# EAGLE board ACB-R1.1 (EAGLE 8.6.0)

Size 63.5 x 185.5 mm. Coordinates in mm from the lower left corner, seen from the top.
Outline: 0,0 63.5,0 63.5,185.5 0,185.5 0,0
Copper layers (1*16): Top 0.035mm / dielectric 1.5mm / Bottom 0.035mm
Design rules "default *": minimum track width 0.2mm, minimum drill 0.3mm, track to track 0.2mm, track to pad 0.2mm, pad to pad 0.2mm, via to via 0.2mm, smd to smd 0.001mm, copper to edge 0.5mm, drill to drill 0.2mm, minimum pad ring 0.3mm, minimum via ring 0.25mm, stop-mask expansion 0.1mm, vias tented up to drill 0.6mm, thermal gap 0.35mm
Net classes: 1 HV: clearance 0.3 mm to class 0
tRestrict: 34 lines

## Footprints (pad centres in the part's own frame; a part is rotated, then mirrored left to right if it is on the bottom)
0603 = smd 0.762 x 0.965: 1 -0.787,0; 2 0.787,0
1206-POL-C = smd 1.19 x 1.79: + -1.6,0; - 1.6,0
1206 = smd 1.143 x 1.702: 1 -1.473,0; 2 1.473,0
CT-C = smd 2.743 x 2.311: + -2.54,0; - 2.54,0
CAP_8MM_DIA_SMT = smd 1.59 x 3.99: 1 0,3.4; 2 0,-3.4
SMA = smd 2.159 x 2.743: + -2.311,0.003; - 2.108,-0.002
SMB@1 = smd 2.4 x 2.4: A 2.2,0; C -2.2,0
0805-POL-D = smd 0.99 x 1.39: A 1,0; K -1,0
SMA' = smd 2.21 x 1.575: A -2.223,0; K 2.223,0
LITTLEFUSE0154 = smd 4.6 x 3.8: 1 3.5,0; 2 -3.5,0
CAM-HOLDER = hole 3.2: 0,4; 0,-4
TQFP100_14X14_0,5MM = smd 1.39 x 0.28: 1 -7.7,6; 2 -7.7,5.5; 3 -7.7,5; 4 -7.7,4.5; 5 -7.7,4; 6 -7.7,3.5; 7 -7.7,3; 8 -7.7,2.5; 9 -7.7,2; 10 -7.7,1.5; 11 -7.7,1; 12 -7.7,0.5; 13 -7.7,0; 14 -7.7,-0.5; 15 -7.7,-1; 16 -7.7,-1.5; 17 -7.7,-2; 18 -7.7,-2.5; 19 -7.7,-3; 20 -7.7,-3.5; 21 -7.7,-4; 22 -7.7,-4.5; 23 -7.7,-5; 24 -7.7,-5.5; 25 -7.7,-6; 51 7.7,-6; 52 7.7,-5.5; 53 7.7,-5; 54 7.7,-4.5; 55 7.7,-4; 56 7.7,-3.5; 57 7.7,-3; 58 7.7,-2.5; 59 7.7,-2; 60 7.7,-1.5; 61 7.7,-1; 62 7.7,-0.5; 63 7.7,0; 64 7.7,0.5; 65 7.7,1; 66 7.7,1.5; 67 7.7,2; 68 7.7,2.5; 69 7.7,3; 70 7.7,3.5; 71 7.7,4; 72 7.7,4.5; 73 7.7,5; 74 7.7,5.5; 75 7.7,6 | smd 0.28 x 1.39: 26 -6,-7.7; 27 -5.5,-7.7; 28 -5,-7.7; 29 -4.5,-7.7; 30 -4,-7.7; 31 -3.5,-7.7; 32 -3,-7.7; 33 -2.5,-7.7; 34 -2,-7.7; 35 -1.5,-7.7; 36 -1,-7.7; 37 -0.5,-7.7; 38 0,-7.7; 39 0.5,-7.7; 40 1,-7.7; 41 1.5,-7.7; 42 2,-7.7; 43 2.5,-7.7; 44 3,-7.7; 45 3.5,-7.7; 46 4,-7.7; 47 4.5,-7.7; 48 5,-7.7; 49 5.5,-7.7; 50 6,-7.7; 76 6,7.7; 77 5.5,7.7; 78 5,7.7; 79 4.5,7.7; 80 4,7.7; 81 3.5,7.7; 82 3,7.7; 83 2.5,7.7; 84 2,7.7; 85 1.5,7.7; 86 1,7.7; 87 0.5,7.7; 88 0,7.7; 89 -0.5,7.7; 90 -1,7.7; 91 -1.5,7.7; 92 -2,7.7; 93 -2.5,7.7; 94 -3,7.7; 95 -3.5,7.7; 96 -4,7.7; 97 -4.5,7.7; 98 -5,7.7; 99 -5.5,7.7; 100 -6,7.7
48-TSOP-I = smd 1.4 x 0.28: 1 -9.7,5.75; 2 -9.7,5.25; 3 -9.7,4.75; 4 -9.7,4.25; 5 -9.7,3.75; 6 -9.7,3.25; 7 -9.7,2.75; 8 -9.7,2.25; 9 -9.7,1.75; 10 -9.7,1.25; 11 -9.7,0.75; 12 -9.7,0.25; 13 -9.7,-0.25; 14 -9.7,-0.75; 15 -9.7,-1.25; 16 -9.7,-1.75; 17 -9.7,-2.25; 18 -9.7,-2.75; 19 -9.7,-3.25; 20 -9.7,-3.75; 21 -9.7,-4.25; 22 -9.7,-4.75; 23 -9.7,-5.25; 24 -9.7,-5.75; 25 9.7,-5.75; 26 9.7,-5.25; 27 9.7,-4.75; 28 9.7,-4.25; 29 9.7,-3.75; 30 9.7,-3.25; 31 9.7,-2.75; 32 9.7,-2.25; 33 9.7,-1.75; 34 9.7,-1.25; 35 9.7,-0.75; 36 9.7,-0.25; 37 9.7,0.25; 38 9.7,0.75; 39 9.7,1.25; 40 9.7,1.75; 41 9.7,2.25; 42 9.7,2.75; 43 9.7,3.25; 44 9.7,3.75; 45 9.7,4.25; 46 9.7,4.75; 47 9.7,5.25; 48 9.7,5.75
TSSOP20 = smd 1.6 x 0.35: 1 -2.9,2.925; 2 -2.9,2.275; 3 -2.9,1.625; 4 -2.9,0.975; 5 -2.9,0.325; 6 -2.9,-0.325; 7 -2.9,-0.975; 8 -2.9,-1.625; 9 -2.9,-2.275; 10 -2.9,-2.925; 11 2.9,-2.925; 12 2.9,-2.275; 13 2.9,-1.625; 14 2.9,-0.975; 15 2.9,-0.325; 16 2.9,0.325; 17 2.9,0.975; 18 2.9,1.625; 19 2.9,2.275; 20 2.9,2.925
SOT23-5 = smd 0.59 x 1.19: 1 -0.95,-1.2; 2 0,-1.2; 3 0.95,-1.2; 4 0.95,1.2; 5 -0.95,1.2
SC-70-5 = smd 0.39 x 0.99: 1 -0.65,-1; 2 0,-1; 3 0.65,-1; 4 0.65,1; 5 -0.65,1
MSOP-08 = smd 0.38 x 1.2: 1 -1,-2.1; 2 -0.35,-2.1; 3 0.3,-2.1; 4 0.95,-2.1; 5 0.95,2.1; 6 0.3,2.1; 7 -0.35,2.1; 8 -1,2.1
MSOP10EXP = smd 0.3 x 1.2: 1 -1,-2.2; 2 -0.5,-2.2; 3 0,-2.2; 4 0.5,-2.2; 5 1,-2.2; 6 1,2.2; 7 0.5,2.2; 8 0,2.2; 9 -0.5,2.2; 10 -1,2.2 | smd 1.88 x 1.68: EP 0,0
SO-08 = smd 0.61 x 1.524: 1 -1.905,-2.743; 2 -0.635,-2.743; 3 0.635,-2.743; 4 1.905,-2.743; 5 1.905,2.743; 6 0.635,2.743; 7 -0.635,2.743; 8 -1.905,2.743
SOT23-5' = smd 0.6 x 1.2: 1 -0.95,-1.206; 2 0,-1.206; 3 0.95,-1.206; 4 0.95,1.206; 5 -0.95,1.206
SO08 = smd 0.61 x 1.524: 1 -1.905,-2.743; 2 -0.635,-2.743; 3 0.635,-2.743; 4 1.905,-2.743; 5 1.905,2.743; 6 0.635,2.743; 7 -0.635,2.743; 8 -1.905,2.743
SOT23 = smd 0.69 x 1.19: 1 0.95,1.2; 2 -0.95,1.2; 3 0,-1.2
SOT-143 = smd 1.09 x 1.19: 1 -0.75,-1.2 | smd 0.69 x 1.19: 2 0.95,-1.2; 3 0.95,1.2; 4 -0.95,1.2
FH12A-24S-05SH = smd 0.3 x 1.5: 1 -5.75,2.8; 2 -5.25,2.8; 3 -4.75,2.8; 4 -4.25,2.8; 5 -3.75,2.8; 6 -3.25,2.8; 7 -2.75,2.8; 8 -2.25,2.8; 9 -1.75,2.8; 10 -1.25,2.8; 11 -0.75,2.8; 12 -0.25,2.8; 13 0.25,2.8; 14 0.75,2.8; 15 1.25,2.8; 16 1.75,2.8; 17 2.25,2.8; 18 2.75,2.8; 19 3.25,2.8; 20 3.75,2.8; 21 4.25,2.8; 22 4.75,2.8; 23 5.25,2.8; 24 5.75,2.8 | smd 1.8 x 1.6: C1 -7.75,-0.5; C2 7.75,-0.5
RJ8-8-180 = drill 0.9 pad 1.4: 1 -4.445,6.35; 2 -3.175,8.89; 3 -1.905,6.35; 4 -0.635,8.89; 5 0.635,6.35; 6 1.905,8.89; 7 3.175,6.35; 8 4.445,8.89 | hole 3.2: 5.715,0; -5.715,0
MOLEX430450613 = drill 1.1 pad 1.8: 1 3,-1.5; 2 0,-1.5; 3 -3,-1.5; 4 3,1.5; 5 0,1.5; 6 -3,1.5 | hole 1: 6,2.45; -6,2.45
3-641215-2 = drill 1 pad 1.8 square: 1 1.27,0 | drill 1 pad 1.8: 2 -1.27,0
DM3AT = smd 0.69 x 1.19: 1 3.3,8; 2 2.2,8; 3 1.1,8; 4 0,8; 5 -1.1,8; 6 -2.2,8; 7 -3.3,8; 8 -4.4,8; G2 -5.35,8 | smd 0.99 x 1.19: G1 4.95,8 | smd 1.19 x 1.19: G3 -6.4,3.7 | smd 1.19 x 0.99: G4 -6.4,-2.6 | smd 1.19 x 2.79: G5 -6.4,-6.65 | smd 1.59 x 1.89: G6 7.3,-7.1
USB_B_180 = drill 0.8 pad 1.4: 1_+5V 1.25,2.8; 2_D- -1.25,2.8; 3_D+ -1.25,-0.6; 4_GND 1.25,-0.6 | drill 2.2 pad 2.8: SH1 -6,0; SH2 6,0
MA08-1-MALE = drill 1 pad 1.6 square: 1 -8.89,0 | drill 1 pad 1.6: 2 -6.35,0; 3 -3.81,0; 4 -1.27,0; 5 1.27,0; 6 3.81,0; 7 6.35,0; 8 8.89,0
MA08-2 = drill 1 pad 1.6 square: 1 -8.89,-1.27 | drill 1 pad 1.6: 2 -8.89,1.27; 3 -6.35,-1.27; 4 -6.35,1.27; 5 -3.81,-1.27; 6 -3.81,1.27; 7 -1.27,-1.27; 8 -1.27,1.27; 9 1.27,-1.27; 10 1.27,1.27; 11 3.81,-1.27; 12 3.81,1.27; 13 6.35,-1.27; 14 6.35,1.27; 15 8.89,-1.27; 16 8.89,1.27
MA05-1 = drill 1 pad 1.6 square: 1 -5.08,0 | drill 1 pad 1.6: 2 -2.54,0; 3 0,0; 4 2.54,0; 5 5.08,0
JP3CLOSE12 = drill 1 pad 1.626 square: 1 -2.54,0 | drill 1 pad 1.626: 2 0,0; 3 2.54,0
1206@1 = smd 1.19 x 1.79: 1 -1.6,0; 2 1.6,0
NR6028 = smd 2.3 x 5.7: 1 2.4,0; 2 -2.4,0
TEMP-PAD = smd 0.2 x 0.2: P$1 0,0
PCB-VPS = drill 3.2 pad 6.6: VPS_PCB_1 55,4
BT_MODULE_BRD = drill 3 pad 6.6: 1 25.5,20.5
MICRO_FET = smd 0.4 x 0.8: 1 -0.65,-1.1; 2 0,-1.1; 3 0.65,-1.1; 4 0.65,1.1; 5 0,1.1; 6 -0.65,1.1 | smd 0.7 x 0.86: P1 -0.5,0; P2 0.5,0
SC70-6 = smd 0.39 x 0.99: 1 -0.65,-1; 2 0,-1; 3 0.65,-1; 4 0.65,1; 5 0,1; 6 -0.65,1
SSOT-6 = smd 0.6 x 1.2: 1 -0.95,-1.2; 2 0,-1.2; 3 0.95,-1.206; 4 0.95,1.2; 5 0,1.2; 6 -0.95,1.2
0603@1 = smd 0.79 x 0.99: 1 -0.8,0; 2 0.8,0
0805 = smd 0.9 x 1.4: 1 -1.04,0; 2 1.04,0
SMD_ROUND_1MM = smd 1 x 1: P$1 0,0
TH_ROUND_14MM08MM = drill 0.8 pad 1.4: P$1 0,0
7B = smd 2 x 1.2: 1 -1.9,-1.2; 2 1.9,-1.2; 3 1.9,1.2; 4 -1.9,1.2

## Placement (x,y rotation side)
C1  100n  [0603]  176.68,58.16 180 top  (outside the outline)
C2  100n  [0603]  167.08,37.66 270 top  (outside the outline)
C3  100n  [0603]  112.08,76.26 90 top  (outside the outline)
C4  100n  [0603]  174.18,86.76 270 top  (outside the outline)
C5  100n  [0603]  112.08,82.06 90 top  (outside the outline)
C6  100n  [0603]  174.18,80.96 270 top  (outside the outline)
C7  100n  [0603]  112.08,79.16 90 top  (outside the outline)
C8  100n  [0603]  174.18,83.86 270 top  (outside the outline)
C9  10uTA  [1206-POL-C]  110.18,74.16 270 top  (outside the outline)
C10  10uTA  [1206-POL-C]  176.08,88.86 90 top  (outside the outline)
C11  10uTA  [1206-POL-C]  110.18,83.96 90 top  (outside the outline)
C12  10uTA  [1206-POL-C]  176.08,79.06 270 top  (outside the outline)
C13  10uTA  [1206-POL-C]  110.18,79.06 270 top  (outside the outline)
C14  10uTA  [1206-POL-C]  176.08,83.96 90 top  (outside the outline)
C15  10u  [0603]  119.78,97.26 180 top  (outside the outline)
C16  10uTA  [1206-POL-C]  110.98,97.06 180 top  (outside the outline)
C17  10uTA  [1206-POL-C]  120.98,93.26 270 top  (outside the outline)
C18  100n  [0603]  119.08,95.06 270 top  (outside the outline)
C19  100n  [0603]  116.38,94.36 0 top  (outside the outline)
C20  10uTA  [1206-POL-C]  117.38,92.46 0 top  (outside the outline)
C21  1n->10n  [0603]  119.48,100.66 180 top  (outside the outline)
C22  4u7/50  [1206]  179.68,120.66 90 top  (outside the outline)
C23  4u7/50  [1206]  177.38,120.66 90 top  (outside the outline)
C24  1n  [0603]  168.28,115.56 90 top  (outside the outline)
C25  470n/25  [0603]  176.88,116.76 270 top  (outside the outline)
C26  10p  [0603]  170.08,122.86 0 top  (outside the outline)
C27  100n  [0603]  106.48,67.76 0 top  (outside the outline)
C28  100n  [0603]  181.28,63.56 0 top  (outside the outline)
C29  4u7/50  [1206]  132.18,106.76 0 top  (outside the outline)
C30  47u/6.3  [1206]  175.18,114.16 180 top  (outside the outline)
C31  47uTC  [CT-C]  173.48,111.16 180 top  (outside the outline)
C32  100n  [0603]  158.68,124.76 180 top  (outside the outline)
C33  100n  [0603]  144.58,96.06 270 top  (outside the outline)
C34  1n  [0603]  144.58,98.96 90 top  (outside the outline)
C35  100n  [0603]  176.18,105.16 0 top  (outside the outline)
C36  100n  [0603]  123.98,33.66 270 top  (outside the outline)
C37  100n  [0603]  121.88,126.46 270 top  (outside the outline)
C38  100n  [0603]  125.98,119.76 180 top  (outside the outline)
C39  100n  [0603]  108.48,118.16 270 top  (outside the outline)
C40  100n  [0603]  107.78,28.76 90 top  (outside the outline)
C41  100n  [0603]  114.98,110.86 180 top  (outside the outline)
C42  100n  [0603]  170.08,129.06 270 top  (outside the outline)
C43  1n  [0603]  164.88,133.26 0 top  (outside the outline)
C44  1n  [0603]  117.38,135.56 90 top  (outside the outline)
C45  100n  [0603]  117.38,132.66 270 top  (outside the outline)
C46  100n  [0603]  162.98,135.06 180 top  (outside the outline)
C47  100n  [0603]  144.08,45.56 0 top  (outside the outline)
C48  1u  [0603]  136.68,34.06 0 top  (outside the outline)
C49  100n  [0603]  131.28,33.66 270 top  (outside the outline)
C50  1u  [0603]  119.68,44.56 180 top  (outside the outline)
C51  100n  [0603]  120.08,55.36 90 top  (outside the outline)
C52  1u  [0603]  132.18,58.06 90 top  (outside the outline)
C53  10u  [0603]  135.98,59.16 90 top  (outside the outline)
C54  10uTA  [1206-POL-C]  134.08,59.06 90 top  (outside the outline)
C55  100n  [0603]  127.68,33.66 270 top  (outside the outline)
C56  10uTA  [1206-POL-C]  129.58,27.56 270 top  (outside the outline)
C57  100n->10n  [0603]  126.18,33.66 270 top  (outside the outline)
C58  100n  [0603]  124.88,27.26 0 top  (outside the outline)
C59  1u->100n  [0603]  124.88,25.76 0 top  (outside the outline)
C60  18p  [0603]  147.88,46.66 0 top  (outside the outline)
C61  18p  [0603]  148.18,54.46 0 top  (outside the outline)
C62  1n  [0603]  159.68,109.46 180 top  (outside the outline)
C63  1n  [0603]  157.88,106.86 90 top  (outside the outline)
C64  100n  [0603]  122.48,33.66 270 top  (outside the outline)
C65  1n  [0603]  118.68,47.56 180 top  (outside the outline)
C66  10n  [0603]  118.68,46.06 180 top  (outside the outline)
C67  10u  [0603]  160.38,101.46 180 top  (outside the outline)
C68  1n->10n  [0603]  116.48,27.76 90 top  (outside the outline)
C69  1n  [0603]  115.78,37.66 270 top  (outside the outline)
C70  1n  [0603]  110.18,100.46 0 top  (outside the outline)
C71  47uTC  [CT-C]  103.88,104.36 90 top  (outside the outline)
C72  100n  [0603]  106.48,102.16 90 top  (outside the outline)
C73  47uTC  [CT-C]  176.58,102.16 180 top  (outside the outline)
C74  100n  [0603]  182.18,101.06 180 top  (outside the outline)
C75  100n  [0603]  172.68,89.76 90 top  (outside the outline)
C76  100n  [0603]  112.08,86.66 270 top  (outside the outline)
C77  100n  [0603]  123.38,132.46 0 top  (outside the outline)
C78  100n  [0603]  123.78,134.96 270 top  (outside the outline)
C79  100n  [0603]  162.68,131.76 90 top  (outside the outline)
C80  100n  [0603]  162.68,128.86 90 top  (outside the outline)
C81  47uTC  [CT-C]  109.98,32.96 180 top  (outside the outline)
C82  1u  [0603]  104.28,67.36 90 top  (outside the outline)
C83  220u/25V  [CAP_8MM_DIA_SMT]  131.38,112.36 90 top  (outside the outline)
C84  220u/25V  [CAP_8MM_DIA_SMT]  179.58,129.86 180 top  (outside the outline)
C85  100n  [0603]  159.78,29.16 180 top  (outside the outline)
C86  10uTA  [1206-POL-C]  113.98,108.96 180 top  (outside the outline)
C87  10uTA  [1206-POL-C]  161.88,43.26 90 top  (outside the outline)
C88  10u  [0603]  127.68,29.96 90 top  (outside the outline)
D2  SMLVT3V3  [SMA]  167.38,109.96 90 top  (outside the outline)
D3  P6SMB20A  [SMB@1]  138.38,104.86 0 top  (outside the outline)
D4  P6SMB20A  [SMB@1]  147.98,104.86 0 top  (outside the outline)
D5  LED-GREEN  [0805-POL-D]  113.08,68.26 0 top  (outside the outline)
D6  SS14  [SMA']  138.68,91.86 0 top  (outside the outline)
D7  SS14  [SMA']  182.38,121.76 270 top  (outside the outline)
F1  T1A-LITTLEFUSE0154  [LITTLEFUSE0154]  131.88,99.46 90 top  (outside the outline)
H1  CAM-HOLDER  [CAM-HOLDER]  58.42,90.96 0 top
H2  CAM-HOLDER  [CAM-HOLDER]  5.08,90.96 0 top
IC1  PIC32MX470F512L-I/PF  [TQFP100_14X14_0,5MM]  131.88,45.86 0 top  (outside the outline)
IC2  R1LV1616  [48-TSOP-I]  177.73,43.06 90 top  (outside the outline)
IC3  74LVC573APW-TSSOP20  [TSSOP20]  167.48,49.89 0 top  (outside the outline)
IC4  74LVC573APW-TSSOP20  [TSSOP20]  167.48,42.78 0 top  (outside the outline)
IC5  TLV73315PDBV  [SOT23-5]  115.58,96.96 90 top  (outside the outline)
IC6  MIC841LYC  [SC-70-5]  177.18,107.56 90 top  (outside the outline)
IC7  24LC32A-I/MS  [MSOP-08]  180.68,61.01 90 top  (outside the outline)
IC8  LT3971EMSE  [MSOP10EXP]  172.58,117.96 90 top  (outside the outline)
IC9  AT25SF321-SSHD  [SO-08]  107.48,63.26 0 top  (outside the outline)
IC10  MAX9938HEUK+T  [SOT23-5']  125.28,109.06 270 top  (outside the outline)
IC11  24LC32A-I/MS  [MSOP-08]  180.68,66.26 90 top  (outside the outline)
IC12  SN65HVD12D  [SO08]  117.38,114.46 90 top  (outside the outline)
IC13  REF3025  [SOT23]  124.58,29.96 270 top  (outside the outline)
IC14  TPD2E001DZDR  [SOT-143]  111.08,117.56 0 top  (outside the outline)
IC15  TPD2E001DZDR  [SOT-143]  158.78,26.46 270 top  (outside the outline)
IC16  MCP6042-I/MS  [MSOP-08]  160.88,105.46 180 top  (outside the outline)
J1  FH12A-24S-0.5SH  [FH12A-24S-05SH]  18,90.95 90 top
J2  FH12A-24S-0.5SH  [FH12A-24S-05SH]  45.5,90.95 270 top
J3  RJ8-8-180  [RJ8-8-180]  31.75,157.54 180 bottom
J4  RJ8-8-180  [RJ8-8-180]  31.75,175.04 180 bottom
J5  MOLEX430450613  [MOLEX430450613]  45.75,173.04 90 bottom
J6  MOLEX430450613  [MOLEX430450613]  17.75,173.04 270 bottom
J7  3-641215-2  [3-641215-2]  44.75,159.74 270 bottom
J8  3-641215-2  [3-641215-2]  18.75,159.74 90 bottom
J9  3-641215-2  [3-641215-2]  5.08,106.2 270 top
J10  3-641215-2  [3-641215-2]  58.42,106.2 90 top
J11  DNP-DM3AT  [DM3AT]  12.4,73.3 270 bottom
J12  USB_A_180  [USB_B_180]  55.48,5.16 0 top
J14  pin1x8  [MA08-1-MALE]  17.68,183.36 0 bottom
J15  pin2x8  [MA08-2]  5,47.5 90 top
J17  DNP-open-hole  [MA05-1]  8.48,2.06 0 top
JP1  JP3CLOSE12  [JP3CLOSE12]  171.38,125.36 0 top  (outside the outline)
L1  LQM31PN3R3M00L  [1206@1]  110.98,94.76 180 top  (outside the outline)
L2  LQM31PN3R3M00L  [1206@1]  176.08,93.76 90 top  (outside the outline)
L3  LQM31PN3R3M00L  [1206@1]  110.18,88.86 270 top  (outside the outline)
L4  LQM31PN3R3M00L  [1206@1]  176.08,74.16 270 top  (outside the outline)
L5  LQM31PN3R3M00L  [1206@1]  110.98,92.46 180 top  (outside the outline)
L6  LQM31PN3R3M00L  [1206@1]  175.28,97.36 180 top  (outside the outline)
L7  HI1206T500R  [1206@1]  133.18,126.26 0 top  (outside the outline)
L8  HI1206T500R  [1206@1]  133.18,123.96 0 top  (outside the outline)
L9  NR6028T4R7M  [NR6028]  180.78,114.36 90 top  (outside the outline)
L10  HI1206T500R  [1206@1]  143.18,103.86 90 top  (outside the outline)
L11  HI1206T500R  [1206@1]  137.78,101.56 180 top  (outside the outline)
L12  HI1206T500R  [1206@1]  147.48,101.66 0 top  (outside the outline)
L13  LQM31PN3R3M00L  [1206@1]  133.68,26.26 0 top  (outside the outline)
O1  PIC-OUT  [TEMP-PAD]  123.18,52.16 0 top  (outside the outline)
O2  PIC-RPX  [TEMP-PAD]  123.18,49.36 90 top  (outside the outline)
O3  PIC-RPX  [TEMP-PAD]  123.18,48.86 90 top  (outside the outline)
O4  PIC-RPX  [TEMP-PAD]  123.18,48.36 90 top  (outside the outline)
O5  PIC-RPX  [TEMP-PAD]  123.18,47.86 0 top  (outside the outline)
O6  PIC-RPX  [TEMP-PAD]  123.18,46.86 0 top  (outside the outline)
O7  PIC-RPX  [TEMP-PAD]  123.18,46.36 0 top  (outside the outline)
O8  PIC-RPX  [TEMP-PAD]  123.18,45.46 0 top  (outside the outline)
O9  PIC-OUT  [TEMP-PAD]  122.58,43.86 0 top  (outside the outline)
O10  PIC-RPX  [TEMP-PAD]  122.58,43.36 0 top  (outside the outline)
O11  PIC-RPX  [TEMP-PAD]  122.58,42.86 0 top  (outside the outline)
O12  PIC-RPX  [TEMP-PAD]  122.58,42.46 0 top  (outside the outline)
O13  PIC-RPX  [TEMP-PAD]  122.58,41.66 0 top  (outside the outline)
O14  PIC-RPX  [TEMP-PAD]  121.48,41.26 270 top  (outside the outline)
O15  PIC-RPX  [TEMP-PAD]  125.58,36.66 90 top  (outside the outline)
O16  PIC-RPX  [TEMP-PAD]  126.18,36.66 0 top  (outside the outline)
O17  PIC-OUT  [TEMP-PAD]  131.88,37.06 0 top  (outside the outline)
O18  PIC-RPX  [TEMP-PAD]  132.38,37.06 0 top  (outside the outline)
O19  PIC-RPX  [TEMP-PAD]  132.88,37.06 0 top  (outside the outline)
O20  PIC-RPX  [TEMP-PAD]  138.68,36.56 0 top  (outside the outline)
O21  PIC-RPX  [TEMP-PAD]  138.68,36.96 0 top  (outside the outline)
O22  PIC-OUT  [TEMP-PAD]  127.08,56.96 0 top  (outside the outline)
O23  PIC-OUT  [TEMP-PAD]  127.48,56.96 0 top  (outside the outline)
O24  PIC-OUT  [TEMP-PAD]  127.88,56.96 0 top  (outside the outline)
O25  PIC-OUT  [TEMP-PAD]  129.08,56.96 0 top  (outside the outline)
O26  PIC-OUT  [TEMP-PAD]  129.48,56.96 0 top  (outside the outline)
O27  PIC-RPX  [TEMP-PAD]  129.88,56.96 0 top  (outside the outline)
O28  PIC-RPX  [TEMP-PAD]  130.28,56.96 0 top  (outside the outline)
O29  PIC-RPX  [TEMP-PAD]  130.68,56.96 0 top  (outside the outline)
O30  PIC-RPX  [TEMP-PAD]  131.08,56.96 0 top  (outside the outline)
O31  PIC-OUT  [TEMP-PAD]  134.08,55.16 0 top  (outside the outline)
O32  PIC-OUT  [TEMP-PAD]  134.38,54.86 0 top  (outside the outline)
O33  PIC-RPX  [TEMP-PAD]  137.28,54.76 0 top  (outside the outline)
O34  PIC-RPX  [TEMP-PAD]  137.88,54.76 0 top  (outside the outline)
O35  PIC-RPX  [TEMP-PAD]  138.88,55.16 0 top  (outside the outline)
O36  PIC-RPX  [TEMP-PAD]  140.78,51.96 90 top  (outside the outline)
O37  PIC-RPX  [TEMP-PAD]  141.18,51.96 90 top  (outside the outline)
O38  PIC-RPX  [TEMP-PAD]  141.58,51.96 90 top  (outside the outline)
O39  PIC-OUT  [TEMP-PAD]  140.53,44.86 0 top  (outside the outline)
O40  PIC-OUT  [TEMP-PAD]  140.53,44.36 0 top  (outside the outline)
O41  PIC-RPX  [TEMP-PAD]  141.03,40.86 180 top  (outside the outline)
O42  PIC-RPX  [TEMP-PAD]  140.48,40.36 180 top  (outside the outline)
O43  PIC-RPX  [TEMP-PAD]  140.48,39.86 0 top  (outside the outline)
O44  PIC-OUT  [TEMP-PAD]  122.58,42.06 0 top  (outside the outline)
PCB2  DNP-PCB-VPS  [PCB-VPS]  0,30 0 top
PCB3  DNP-PCB-BT  [BT_MODULE_BRD]  29.68,184.56 270 bottom
Q1  SSM6P49NU,LFPZ  [MICRO_FET]  115.08,100.26 90 top  (outside the outline)
Q2  SSM6P49NU,LFPZ  [MICRO_FET]  116.18,32.76 0 top  (outside the outline)
Q3  FDG6303N  [SC70-6]  103.88,110.36 180 top  (outside the outline)
Q4  FDG6303N  [SC70-6]  148.38,98.56 180 top  (outside the outline)
Q5  FDC6506P  [SSOT-6]  141.48,98.56 90 top  (outside the outline)
Q6  FDC6506P  [SSOT-6]  165.48,129.16 90 top  (outside the outline)
Q7  FDG6303N  [SC70-6]  168.28,132.36 270 top  (outside the outline)
Q8  FDC6506P  [SSOT-6]  120.58,134.96 270 top  (outside the outline)
Q9  FDG6303N  [SC70-6]  113.28,132.26 0 top  (outside the outline)
Q10  FDG6303N  [SC70-6]  120.18,129.66 180 top  (outside the outline)
Q11  FDG6303N  [SC70-6]  174.08,135.46 0 top  (outside the outline)
Q12  FDG6303N  [SC70-6]  122.68,121.06 270 top  (outside the outline)
Q13  FDG6303N  [SC70-6]  161.48,121.96 0 top  (outside the outline)
Q14  FDG6303N  [SC70-6]  168.48,94.86 270 top  (outside the outline)
R1  1M  [0603@1]  165.48,37.66 90 top  (outside the outline)
R2  1M  [0603@1]  168.78,35.06 180 top  (outside the outline)
R3  1M  [0603@1]  180.18,57.56 90 top  (outside the outline)
R4  1M  [0603@1]  159.98,43.06 90 top  (outside the outline)
R5  1M  [0603@1]  178.28,30.26 180 top  (outside the outline)
R6  0R  [0603@1]  112.08,73.36 270 top  (outside the outline)
R7  0R  [0603@1]  174.18,89.76 90 top  (outside the outline)
R8  1R  [0805]  119.48,98.96 0 top  (outside the outline)
R9  1M  [0603@1]  119.48,102.16 0 top  (outside the outline)
R10  100k  [0603@1]  116.58,102.36 0 top  (outside the outline)
R11  10k  [0603@1]  112.08,89.86 90 top  (outside the outline)
R12  100k  [0603@1]  113.58,89.86 90 top  (outside the outline)
R13  10k  [0603@1]  175.78,70.96 0 top  (outside the outline)
R14  10k  [0603@1]  175.78,69.46 0 top  (outside the outline)
R15  10k  [0603@1]  174.18,93.26 90 top  (outside the outline)
R16  100k  [0603@1]  172.68,93.26 90 top  (outside the outline)
R17  47k  [0603@1]  171.28,114.56 0 top  (outside the outline)
R18  10k  [0603@1]  181.08,68.86 180 top  (outside the outline)
R19  560k  [0603@1]  171.38,121.36 0 top  (outside the outline)
R20  1M  [0603@1]  168.48,121.36 0 top  (outside the outline)
R21  1M  [0603@1]  172.98,122.86 180 top  (outside the outline)
R22  4M99  [0603@1]  176.88,123.86 180 top  (outside the outline)
R23  0R/1M  [0603@1]  142.48,93.86 180 top  (outside the outline)
R24  100k  [0603@1]  115.08,35.46 180 top  (outside the outline)
R25  1M  [0603@1]  106.38,58.76 0 top  (outside the outline)
R26  10k  [0603@1]  176.08,63.56 270 top  (outside the outline)
R27  10k  [0603@1]  176.08,66.56 90 top  (outside the outline)
R28  100R  [0603@1]  174.38,107.46 90 top  (outside the outline)
R29  300R  [0603@1]  116.48,68.46 180 top  (outside the outline)
R30  1M  [0603@1]  110.98,113.86 270 top  (outside the outline)
R31  1M  [0603@1]  108.98,120.36 180 top  (outside the outline)
R32  1M  [0603@1]  111.88,120.36 0 top  (outside the outline)
R33  4M99  [0603@1]  180.48,108.16 0 top  (outside the outline)
R34  1M  [0603@1]  112.78,113.86 90 top  (outside the outline)
R35  1k  [0805]  138.18,95.16 90 top  (outside the outline)
R36  1k  [0805]  138.18,98.66 90 top  (outside the outline)
R37  1k  [0805]  136.28,95.16 90 top  (outside the outline)
R38  1k  [0805]  136.28,98.66 90 top  (outside the outline)
R39  0.025R  [0805]  128.78,106.16 270 top  (outside the outline)
R40  300k  [0603@1]  150.78,95.36 90 top  (outside the outline)
R41  1M  [0603@1]  150.78,98.96 270 top  (outside the outline)
R42  1M  [0603@1]  146.08,96.06 270 top  (outside the outline)
R43  300k  [0603@1]  148.28,95.36 180 top  (outside the outline)
R44  1M  [0603@1]  148.28,92.36 0 top  (outside the outline)
R45  1M  [0603@1]  146.08,98.96 90 top  (outside the outline)
R46  560k  [0603@1]  179.08,105.16 0 top  (outside the outline)
R47  100k  [0603@1]  180.48,106.66 0 top  (outside the outline)
R48  1M  [0603@1]  148.28,93.86 180 top  (outside the outline)
R49  1M  [0603@1]  145.38,93.86 180 top  (outside the outline)
R50  1M  [0603@1]  168.58,129.06 270 top  (outside the outline)
R51  300k  [0603@1]  167.28,135.46 270 top  (outside the outline)
R52  1M  [0603@1]  165.78,135.46 90 top  (outside the outline)
R53  300k  [0603@1]  168.78,135.46 90 top  (outside the outline)
R54  1M  [0603@1]  170.28,135.46 90 top  (outside the outline)
R55  1M  [0603@1]  165.08,131.76 0 top  (outside the outline)
R56  1M  [0603@1]  115.88,135.56 90 top  (outside the outline)
R57  300k  [0603@1]  112.68,129.06 90 top  (outside the outline)
R58  1M  [0603@1]  114.28,129.06 270 top  (outside the outline)
R59  300k  [0603@1]  112.48,136.26 180 top  (outside the outline)
R60  1M  [0603@1]  112.28,134.76 180 top  (outside the outline)
R61  1M  [0603@1]  115.88,132.66 270 top  (outside the outline)
R62  100R  [0603@1]  162.98,136.56 0 top  (outside the outline)
R63  1k->4k7  [0603@1]  166.48,137.66 0 top  (outside the outline)
R64  1k  [0603@1]  171.78,135.46 90 top  (outside the outline)
R65  1M  [0603@1]  113.98,37.66 270 top  (outside the outline)
R66  100k  [0603@1]  159.28,90.86 0 top  (outside the outline)
R67  1M  [0603@1]  176.38,136.56 90 top  (outside the outline)
R68  100R  [0603@1]  158.68,123.26 0 top  (outside the outline)
R69  1k->4k7  [0603@1]  161.58,124.76 0 top  (outside the outline)
R70  1k  [0603@1]  159.28,119.56 270 top  (outside the outline)
R71  10k  [0603@1]  120.78,110.16 270 top  (outside the outline)
R72  1M  [0603@1]  117.88,110.86 0 top  (outside the outline)
R73  1M  [0603@1]  117.88,109.36 180 top  (outside the outline)
R74  100k  [0603@1]  160.08,92.36 0 top  (outside the outline)
R75  100k  [0603@1]  112.38,99.66 270 top  (outside the outline)
R76  1M  [0603@1]  163.78,122.56 90 top  (outside the outline)
R77  47k  [0603@1]  168.28,118.46 270 top  (outside the outline)
R78  100R  [0603@1]  123.38,130.16 180 top  (outside the outline)
R79  1k->4k7  [0603@1]  123.38,128.66 180 top  (outside the outline)
R80  1k  [0603@1]  120.38,126.46 270 top  (outside the outline)
R81  100k  [0603@1]  131.78,91.06 0 top  (outside the outline)
R82  1M  [0603@1]  110.18,98.96 0 top  (outside the outline)
R83  1M  [0603@1]  118.78,126.46 270 top  (outside the outline)
R84  100R  [0603@1]  125.98,118.26 180 top  (outside the outline)
R85  1k->4k7  [0603@1]  125.98,121.26 180 top  (outside the outline)
R86  1k  [0603@1]  125.98,122.76 0 top  (outside the outline)
R87  1M  [0603@1]  117.98,27.76 90 top  (outside the outline)
R88  1M  [0603@1]  122.88,118.86 0 top  (outside the outline)
R89  100k  [0603@1]  131.78,92.56 0 top  (outside the outline)
R90  1k  [0603@1]  109.98,26.46 0 top  (outside the outline)
R91  10k  [0603@1]  109.98,27.96 0 top  (outside the outline)
R92  10R  [0603@1]  134.68,28.16 180 top  (outside the outline)
R93  300R  [0603@1]  121.78,30.76 270 top  (outside the outline)
R94  180k  [0603@1]  163.98,110.16 270 top  (outside the outline)
R95  4M99  [0603@1]  162.18,110.16 270 top  (outside the outline)
R96  560k  [0603@1]  159.68,110.96 180 top  (outside the outline)
R97  180k  [0603@1]  156.08,103.66 90 top  (outside the outline)
R98  4M99  [0603@1]  157.88,103.66 90 top  (outside the outline)
R99  560k  [0603@1]  156.38,106.86 90 top  (outside the outline)
R100  2k2  [0603@1]  163.98,104.06 270 top  (outside the outline)
R101  2k2  [0603@1]  163.98,106.96 90 top  (outside the outline)
R102  1k  [0603@1]  127.38,100.36 270 top  (outside the outline)
R103  300R  [0603@1]  163.28,101.46 0 top  (outside the outline)
R104  1R  [0805]  114.78,28.96 270 top  (outside the outline)
R105  1R  [0805]  117.48,36.46 90 top  (outside the outline)
R106  1R  [0805]  111.38,102.16 180 top  (outside the outline)
R107  100k  [0603@1]  117.18,29.96 0 top  (outside the outline)
R108  10R->1R->0R  [0603@1]  111.18,122.56 270 top  (outside the outline)
R109  10R->1R->0R  [0603@1]  112.68,122.56 270 top  (outside the outline)
R110  100R  [0603@1]  106.48,105.06 90 top  (outside the outline)
R111  100R  [0603@1]  106.48,107.96 90 top  (outside the outline)
R112  1M  [0603@1]  103.98,112.86 0 top  (outside the outline)
R113  100R  [0603@1]  103.98,114.36 0 top  (outside the outline)
R114  100R  [0603@1]  107.98,105.06 90 top  (outside the outline)
R115  100R  [0603@1]  107.98,107.96 90 top  (outside the outline)
R116  100R  [0603@1]  170.18,100.76 90 top  (outside the outline)
R117  100R  [0603@1]  170.98,97.86 270 top  (outside the outline)
R118  1M  [0603@1]  166.78,97.16 0 top  (outside the outline)
R119  100R  [0603@1]  165.98,94.66 270 top  (outside the outline)
R122  100R  [0603@1]  171.68,100.76 90 top  (outside the outline)
R123  100R  [0603@1]  169.48,97.86 270 top  (outside the outline)
R124  0R  [0603@1]  103.18,117.36 270 top  (outside the outline)
R125  0R  [0603@1]  182.98,107.36 270 top  (outside the outline)
R126  0R  [0603@1]  114.18,92.76 90 top  (outside the outline)
R127  1M  [0603@1]  110.08,58.76 180 top  (outside the outline)
R128  10k  [0603@1]  145.68,27.76 90 top  (outside the outline)
R129  DNP/0R  [0603@1]  167.88,104.66 90 top  (outside the outline)
R130  100k  [0603@1]  115.48,52.86 270 top  (outside the outline)
R131  100k  [0603@1]  114.38,57.26 90 top  (outside the outline)
R132  1M  [0603@1]  151.08,101.86 270 top  (outside the outline)
REF1  REF  [REF]  181.88,29.26 0 top  (outside the outline)
REF2  REF  [REF]  107.48,137.06 0 top  (outside the outline)
T1  PIC-OUT  [TEMP-PAD]  141.08,44.86 0 top  (outside the outline)
T2  PIC-OUT  [TEMP-PAD]  129.48,57.51 0 top  (outside the outline)
T3  PIC-RPX  [TEMP-PAD]  122.63,46.36 180 top  (outside the outline)
T4  PIC-OUT  [TEMP-PAD]  129.08,57.51 270 top  (outside the outline)
T5  PIC-OUT  [TEMP-PAD]  141.03,40.36 180 top  (outside the outline)
T6  PIC-OUT  [TEMP-PAD]  141.08,44.36 180 top  (outside the outline)
T7  PIC-OUT  [TEMP-PAD]  140.48,40.86 180 top  (outside the outline)
T8  PIC-OUT  [TEMP-PAD]  141.03,39.86 180 top  (outside the outline)
T9  PIC-RPX  [TEMP-PAD]  130.28,57.51 180 top  (outside the outline)
T10  PIC-RPX  [TEMP-PAD]  139.23,36.56 0 top  (outside the outline)
T11  PIC-RPX  [TEMP-PAD]  138.28,55.16 0 top  (outside the outline)
T12  PIC-RPX  [TEMP-PAD]  139.23,36.96 0 top  (outside the outline)
T13  PIC-RPX  [TEMP-PAD]  130.68,57.51 0 top  (outside the outline)
T14  PIC-RPX  [TEMP-PAD]  131.08,57.51 270 top  (outside the outline)
T15  PIC-OUT  [TEMP-PAD]  134.43,55.51 270 top  (outside the outline)
T16  PIC-RPX  [TEMP-PAD]  122.63,48.86 90 top  (outside the outline)
T17  PIC-RPX  [TEMP-PAD]  138.48,54.76 270 top  (outside the outline)
T18  PIC-RPX  [TEMP-PAD]  122.63,49.36 270 top  (outside the outline)
T19  PIC-RPX  [TEMP-PAD]  122.63,48.36 0 top  (outside the outline)
T20  PIC-OUT  [TEMP-PAD]  127.08,57.51 180 top  (outside the outline)
T21  PIC-OUT  [TEMP-PAD]  132.38,36.51 270 top  (outside the outline)
T22  PIC-RPX  [TEMP-PAD]  122.03,41.66 180 top  (outside the outline)
T23  PIC-RPX  [TEMP-PAD]  122.03,42.46 270 top  (outside the outline)
T24  PIC-RPX  [TEMP-PAD]  122.03,42.86 270 top  (outside the outline)
T25  PIC-OUT  [TEMP-PAD]  122.03,43.36 270 top  (outside the outline)
T26  PIC-OUT  [TEMP-PAD]  120.93,41.26 270 top  (outside the outline)
T27  PIC-OUT  [TEMP-PAD]  122.63,46.86 270 top  (outside the outline)
T28  PIC-OUT  [TEMP-PAD]  131.88,36.51 270 top  (outside the outline)
T29  PIC-OUT  [TEMP-PAD]  122.63,47.86 0 top  (outside the outline)
T30  PIC-OUT  [TEMP-PAD]  127.88,57.51 180 top  (outside the outline)
T31  PIC-OUT  [TEMP-PAD]  122.03,43.86 270 top  (outside the outline)
T32  PIC-OUT  [TEMP-PAD]  122.03,42.06 270 top  (outside the outline)
T33  PIC-OUT  [TEMP-PAD]  127.48,57.51 270 top  (outside the outline)
T34  PIC-RPX  [TEMP-PAD]  129.88,57.51 180 top  (outside the outline)
T35  PIC-RPX  [TEMP-PAD]  132.88,36.51 270 top  (outside the outline)
T36  PIC-OUT  [TEMP-PAD]  122.78,52.56 0 top  (outside the outline)
T37  PIN-AN  [TEMP-PAD]  125.18,36.26 0 top  (outside the outline)
T38  PIN-AN  [TEMP-PAD]  125.78,36.26 270 top  (outside the outline)
T39  PIN-AN  [TEMP-PAD]  122.63,45.46 270 top  (outside the outline)
T40  PIC-RPX  [TEMP-PAD]  141.18,52.51 90 top  (outside the outline)
T41  PIC-RPX  [TEMP-PAD]  140.78,52.51 90 top  (outside the outline)
T42  PIC-OUT  [TEMP-PAD]  141.58,52.51 270 top  (outside the outline)
T43  PIC-RPX  [TEMP-PAD]  137.68,55.16 0 top  (outside the outline)
T44  PIC-OUT  [TEMP-PAD]  134.73,55.21 270 top  (outside the outline)
T45  PIC-RPX  [TEMP-PAD]  175.48,107.86 180 top  (outside the outline)
T46  PIC-RPX  [TEMP-PAD]  103.78,70.26 0 top  (outside the outline)
TP1  DNP-TestPoint  [SMD_ROUND_1MM]  178.68,68.86 0 top  (outside the outline)
TP2  DNP-TestPoint  [TH_ROUND_14MM08MM]  171.58,105.26 0 top  (outside the outline)
TP4  DNP-TestPoint  [TH_ROUND_14MM08MM]  114.38,72.36 180 top  (outside the outline)
X1  8MHz-5x3.2mm  [7B]  147.58,50.56 270 top  (outside the outline)

## Library data of the parts
C1-C30 C32-C70 C72 C74-C80 C82 C85-C88 D5 L1-L8 L10-L13 R1-R119 R122-R132 = DISCRETE
C31 C71 C73 C81 D6 D7 JP1 = SmdDisc
C83 C84 = SMD-ELYT
D2 = st-microelectronics-AOM
D3 D4 = Littelfuse
F1 IC6 = ArdDisp
H1 H2 IC1-IC5 IC8 IC13 J3-J6 J12 PCB2 = ACB
IC7 IC11 IC16 = Microchip-AON
IC9 = Micron-U
IC10 = Touchstone-U
IC12 = TexasInstruments-AON
IC14 IC15 = Semtech-AOM
J1 J2 J11 = CON-Hirose-AON
J7-J10 = Tyco-U
J14 J15 J17 = CON-pinHeader-AON
L9 = Sumida-UT
O1-O44 T1-T46 TP1 TP2 TP4 = TESTPAD
PCB3 = BT_modul
Q1 Q2 = Toshiba-AON
Q3-Q14 = Fairchild-AON
REF1 REF2 = technol
X1 = TXC_Tech-U

## Nets
1.5V-CAM: L5.1 L6.2 R126.1
1.5V-CAM-OUT: C19.1 C20.+ IC5.5 R126.2
3.3V/CAM: C16.+ C17.+ C18.1 IC5.1 IC5.3 L1.1 L2.2 L3.1 L4.2 Q1.6 Q1.P1 R11.2 R12.2 R13.2 R14.2 R15.2 R16.2
+3,3V-FILT: C35.1 IC6.5 R28.1
+3.3V: C15.1 C21.1 C47.1 C48.1 C49.1 C50.1 C51.1 C52.1 C68.1 C69.1 C70.1 C81.+ IC1.2 IC1.16 IC1.37 IC1.46 IC1.55 IC1.62 IC1.86 J14.2 J17.2 L13.1 R8.2 R9.2 R28.2 R65.1 R66.2 R74.2 R81.2 R82.1 R87.1 R89.2 R91.2 R103.2 R104.2 R105.2 R106.2 R129.1
+3.3V/1: C1.1 C2.1 C28.1 C87.+ IC2.37 IC3.20 IC4.20 IC7.8 IC11.2 IC11.8 Q2.3 Q2.P2 R3.2 R4.2 R18.1 R26.1 R27.1
+3.3V/2: C41.1 C86.+ IC12.8 Q1.3 Q1.P2 R30.2 R34.1 R72.1 R73.2
+3.3V/VPS: C27.1 C82.1 IC9.3 IC9.7 IC9.8 J11.4 J15.1 Q2.6 Q2.P1 R25.2
/3.3V1PWRON: IC1.21 O44.P$1 R24.2 T32.P$1
/3.3V2PWRON: IC1.96 O23.P$1 R75.2 T33.P$1
/CAM-PWRON: IC1.95 O24.P$1 R10.1 T30.P$1
/FMEM1-CS: IC1.11 IC9.1 O6.P$1 R25.1 T27.P$1
/MCLR: IC1.13 J17.1 R90.2
/NCS: IC1.23 J15.13 O14.P$1 T26.P$1
/PRESENT: J11.G2 R131.2 T46.P$1
/VPS-PWRON: IC1.17 O9.P$1 R107.2 T31.P$1
A0: IC2.20 IC3.12
A1: IC2.21 IC3.13
A2: IC2.22 IC3.14
A3: IC2.23 IC3.15
A4: IC2.24 IC3.16
A5: IC2.25 IC3.17
A6: IC2.45 IC3.18
A7: IC2.48 IC3.19
A8: IC2.19 IC4.19
A9: IC2.18 IC4.18
A10: IC2.17 IC4.17
A11: IC2.16 IC4.16
A12: IC2.9 IC4.15
A13: IC2.8 IC4.14
A14: IC2.7 IC4.13
A15: IC2.6 IC4.12
A16: IC1.32 IC2.5
A17: IC1.33 IC2.4
A18: IC1.34 IC2.3
A19: IC1.35 IC2.2
A20: IC1.41 IC2.1
A+ [HV]: J3.4 J4.4 L8.2
A++ [HV]: IC12.6 IC14.3 R32.2 R34.2 R109.2
AGND1: C3.1 C9.- J1.2 R6.1
AGND2: C4.1 C10.- J2.2 R7.1
AVDD: C55.1 C56.+ C88.1 IC1.30 R92.2
AVDD1: C3.2 C9.+ J1.4 L1.2
AVDD2: C4.2 C10.+ J2.4 L2.1
B- [HV]: J3.5 J4.5 L7.2
B-- [HV]: IC12.7 IC14.2 R31.1 R32.1 R108.2
BT-RTS: IC1.83 J14.7 O32.P$1 T44.P$1
BT-RX: IC1.73 J14.3 O37.P$1 T40.P$1
BT-TX: IC1.74 J14.4 O36.P$1 T41.P$1
CON-LED: IC1.78 J14.6 O33.P$1 T43.P$1
CS-SRAM: IC1.38 IC2.12 O17.P$1 R5.2 T28.P$1
CURR-SENSE: C66.1 IC1.14 O8.P$1 R102.2 T39.P$1
D0: IC1.93 IC2.29 IC3.9 IC4.2
D1: IC1.94 IC2.31 IC3.8 IC4.3
D2: IC1.98 IC2.33 IC3.7 IC4.4
D3: IC1.99 IC2.35 IC3.6 IC4.5
D4: IC1.100 IC2.38 IC3.5 IC4.6
D5: IC1.3 IC2.40 IC3.4 IC4.7
D6: IC1.4 IC2.42 IC3.3 IC4.8
D7: IC1.5 IC2.44 IC3.2 IC4.9
D_N: IC1.56 IC15.2 J12.2_D-
D_P: IC1.57 IC15.3 J12.3_D+
DGND [GND]: C1.2 C2.2 C5.2 C6.2 C7.1 C8.1 C11.- C12.- C13.- C14.- C15.2 C16.- C17.- C18.2 C19.2 C20.- C22.2 C23.2 C24.1 C27.2 C28.2 C29.2 C30.2 C31.- C32.2 C35.2 C36.2 C37.2 C38.2 C39.2 C40.2 C41.2 C46.2 C47.2 C48.2 C49.2 C50.2 C51.2 C52.2 C53.2 C54.- C55.2 C56.- C57.2 C58.2 C59.2 C60.2 C61.2 C62.2 C63.2 C64.2 C65.2 C66.2 C67.2 C75.2 C76.2 C77.2 C78.2 C79.2 C80.2 C81.- C82.2 C83.2 C84.2 C85.2 C86.- C87.- C88.2 D2.- D5.K D7.A IC1.15 IC1.31 IC1.36 IC1.45 IC1.65 IC1.75 IC2.14 IC2.15 IC2.26 IC2.27 IC2.46 IC2.47 IC3.1 IC3.10 IC4.1 IC4.10 IC5.2 IC6.2 IC7.1 IC7.2 IC7.3 IC7.4 IC7.7 IC8.10 IC8.EP IC9.4 IC10.1 IC10.2 IC11.1 IC11.3 IC11.4 IC12.5 IC13.3 IC14.1 IC15.1 IC16.4 J1.15 J2.15 J5.1 J6.1 J11.6 J11.G1 J11.G3 J11.G4 J11.G5 J11.G6 J12.4_GND J12.SH1 J12.SH2 J14.1 J15.9 J17.3 L12.1 PCB2.VPS_PCB_1 PCB3.1 Q3.1 Q10.4 Q11.4 Q12.4 Q13.4 Q14.1 R1.1 R2.1 R5.1 R6.2 R7.2 R17.2 R19.2 R21.2 R31.2 R40.1 R41.2 R43.1 R44.2 R46.1 R48.1 R51.1 R52.2 R53.2 R54.2 R57.1 R58.2 R59.2 R60.2 R64.2 R67.2 R70.2 R71.2 R76.2 R80.2 R83.2 R86.2 R88.2 R96.2 R99.2 R112.2 R118.2 R127.1
DGND-F [HV]: D3.A D4.A J3.2 J3.7 J3.8 J4.2 J4.7 J4.8 L12.2
DOOR1IN: IC1.50 O21.P$1 Q13.3 R74.1 T12.P$1
DOOR2IN: IC1.77 O34.P$1 Q12.3 R89.1 T11.P$1
DOOR-IN-EN: IC1.51 O43.P$1 Q12.2 Q13.2 R76.1 R88.1 T8.P$1
DOVDD1: C5.1 C11.+ J1.11 L3.2
DOVDD2: C6.1 C12.+ J2.11 L4.1
DVDD1: C7.2 C13.+ J1.10 L5.2
DVDD2: C8.2 C14.+ J2.10 L6.1
EN: IC1.18 J15.8 O10.P$1 T25.P$1
GATE-Q12A: C33.2 Q4.6 Q5.1 R42.2
GATE-Q12B: C34.2 Q4.3 Q5.3 R45.2
HREF: IC1.6 J1.9 J2.9 O2.P$1 T18.P$1
INFRA1PWM: IC1.90 O27.P$1 R113.2 T34.P$1
INFRA2PWM: IC1.40 O19.P$1 R119.2 T35.P$1
IRQ: IC1.19 J15.3 O11.P$1 T24.P$1
L1CTL [HV]: C79.1 J5.3 Q6.4
L1PWR [HV]: C80.1 J5.2 Q6.6
L2CTL: C78.1 J6.3 Q8.6
L2PWR: C77.1 J6.2 Q8.4
LAN-CTL: IC1.84 IC12.2 IC12.3 O31.P$1 R71.1 T15.P$1
LAN-RX: IC1.88 IC12.1 O29.P$1 R72.2 T13.P$1
LAN-TX: IC1.87 IC12.4 O30.P$1 R73.1 T14.P$1
LED-PIC: IC1.1 O1.P$1 R29.1 T36.P$1 TP4.P$1
LEH-SRAM: IC1.43 IC4.11 R2.2
LEL-SRAM: IC1.44 IC3.11 R1.2
LOCK1CTL: IC1.61 O39.P$1 Q7.5 R54.1 T1.P$1
LOCK1IN: IC1.49 O20.P$1 Q11.3 R66.1 T10.P$1
LOCK2CTL: IC1.91 O26.P$1 Q9.2 R58.1 T2.P$1
LOCK2IN: IC1.89 O28.P$1 Q10.3 R81.1 T9.P$1
LOCK12PWR: IC1.92 O25.P$1 Q7.2 Q9.5 R52.1 R60.1 T4.P$1
LOCK-IN-EN: IC1.60 O40.P$1 Q10.2 Q11.2 R67.1 R83.1 T6.P$1
N$1: Q1.1 R8.1
N$2 [HV]: J5.4 R62.1
N$3: C21.2 Q1.2 R9.1 R10.2
N$4: Q11.1 Q11.5 R64.1
N$5: Q11.6 R63.2
N$6: Q12.1 Q12.5 R86.1
N$7: Q10.1 Q10.5 R80.1
N$8 [HV]: J7.2 R68.1
N$9 [GND]: Q13.1 Q13.5 R70.1
N$10: Q12.6 R85.2
N$11 [HV]: Q13.6 R69.2
N$12 [HV]: C32.1 R68.2 R69.1
N$13: IC11.7 R18.2 TP1.P$1
N$14: D5.A R29.2
N$15: Q7.1 R51.2
N$16: Q4.1 R40.2
N$17: Q4.4 R43.2
N$18: C39.1 IC14.4 R30.1
N$19: Q10.6 R79.2
N$20 [HV]: R35.2 R36.1 R37.2 R38.1
N$21 [HV]: C29.1 F1.1 IC10.5 R39.2
N$22: Q9.1 R57.2
N$23: C42.2 Q6.1 Q7.6 R50.2
N$24: L13.2 R92.1
N$25: Q7.4 R53.1
N$26 [HV]: J10.2 R116.1 R122.1
N$27: IC6.1 R46.2 R47.1
N$28: IC6.3 R33.1 R47.2
N$29: C44.2 Q8.1 Q9.6 R56.2
N$30: Q9.4 R59.1
N$31: C43.2 Q6.3 Q7.3 R55.2
N$32: C61.1 IC1.64 X1.1
N$33: C45.2 Q8.3 Q9.3 R61.2
N$35: Q2.1 R104.1
N$36: Q1.4 R106.1
N$37 [HV]: C46.1 R62.2 R63.1
N$38 [HV]: F1.2 Q5.6 R35.1 R37.1 R97.1
N$39: C60.1 IC1.63 X1.3
N$40: J6.4 R78.1
N$41 [HV]: C37.1 R78.2 R79.1
N$43 [HV]: J8.2 R84.1
N$44: C58.1 C59.1 IC13.1 R93.2
N$46 [HV]: C71.+ C72.1 J9.1 R124.2
N$47 [HV]: C73.+ C74.1 J10.1 R125.2
N$48: R94.2 R95.1
N$49: C62.1 IC16.3 R95.2 R96.1
N$50: C26.2 IC8.6 R19.1 R20.2
N$51: C24.2 R77.2
N$52 [HV]: C25.1 D7.K IC8.3 L9.1
N$53: IC8.8 R17.1
N$54: IC8.7 R77.1
N$55 [HV]: IC8.5 JP1.2 R22.2
N$56: Q2.4 R105.1
N$57 [HV]: C25.2 IC8.2
N$58: C68.2 Q2.2 R87.2 R107.1
N$59 [HV]: L7.1 R108.1
N$60: R97.2 R98.1
N$61 [HV]: C38.1 R84.2 R85.1
N$62: R23.1 R49.2
N$63: C63.1 IC16.5 R98.2 R99.1
N$64: IC16.6 IC16.7 R100.2
N$65: C67.1 IC16.8 R103.1
N$66: IC16.1 IC16.2 R101.2
N$67: C69.2 Q2.5 R24.1 R65.2
N$68: IC10.3 R102.1
N$70: C40.1 R90.1 R91.1
N$73: C70.2 Q1.5 R75.1 R82.2
N$74 [HV]: L8.1 R109.1
N$76 [HV]: J9.2 R110.1 R114.1
N$77 [HV]: C73.- C74.2 R116.2 R117.1 R122.2 R123.1
N$78 [HV]: C71.- C72.2 R110.2 R111.1 R114.2 R115.1
N$79: Q3.6 R111.2 R115.2
N$80: Q3.2 R112.1 R113.1
N$81: Q14.6 R117.2 R123.2
N$83: Q14.2 R118.1 R119.1
N$85 [HV]: C85.1 D6.A IC15.4 J12.1_+5V R128.1
N$87 [HV]: JP1.1 R21.1
NC-A15-2: IC1.42
OE-SRAM: IC1.82 IC2.28 R3.1
OUT+3.3V [GND]: C26.1 C30.1 C31.+ D2.+ IC8.1 L9.2 R20.1 R129.2
PCLK: IC1.76 J1.17 J2.17 O35.P$1 T17.P$1
PGC: IC1.24 J17.5 R131.1
PGD: IC1.25 J17.4 R130.2
POWER-GOOD: IC6.4 R130.1 T45.P$1 TP2.P$1
PWDN-CAM1: IC1.97 J1.8 O22.P$1 R12.1 T20.P$1
PWDN-CAM2: IC1.39 J2.8 O18.P$1 R16.1 T21.P$1
REF2,5V: C57.1 IC1.29 IC13.2
REF-EN: IC1.28 R93.1
RESET-CAM1: C76.1 J1.6 R11.1
RESET-CAM2: C75.1 J2.6 R15.1
SCL1-EEPROM: IC1.66 IC7.6 IC11.6 R26.2
SCLK2-SPI: IC1.10 IC9.6 J11.5 J15.12
SD-CS: IC1.9 J11.2 O5.P$1 R127.2 T29.P$1
SDA1-EEPROM: IC1.67 IC7.5 IC11.5 R27.2
SDI2-MISO: IC1.22 IC9.2 J11.7 J15.11 O13.P$1 T22.P$1
SDO2-MOSI: IC1.20 IC9.5 J11.3 J15.14 O12.P$1 T23.P$1
SIO-C-CAM: IC1.58 J1.5 J2.5 R13.1
SIO-D-CAM: IC1.59 J1.3 J2.3 R14.1
VBAT [HV]: C22.1 C23.1 C42.1 C43.1 C44.1 C45.1 C83.1 C84.1 IC8.4 IC10.4 J5.5 J6.5 J7.1 J8.1 JP1.3 Q6.2 Q6.5 Q8.2 Q8.5 R22.1 R33.2 R39.1 R50.1 R55.1 R56.1 R61.1 R124.1 R125.1
VBAT-LAN [HV]: D3.C J3.1 J3.3 J4.1 J4.3 L11.2
VBAT-LAN-F [HV]: C33.1 C34.1 D6.K L11.1 Q5.2 Q5.5 R36.2 R38.2 R42.1 R45.1 R94.1 R132.1
VBAT-ON: IC1.52 O42.P$1 Q4.2 R41.1 R132.2 T5.P$1
VBAT-SENSE: C64.1 IC1.26 O15.P$1 R100.1 T37.P$1
VBATLAN-SENSE: C36.1 IC1.27 O16.P$1 R101.1 T38.P$1
VBUS: IC1.54 R128.2
VCAP: C53.1 C54.+ IC1.85
VPS-ON: IC1.53 O41.P$1 Q4.5 R44.1 T7.P$1
VPS-PWR [HV]: D4.C J3.6 J4.6 L10.2
VPS-PWR-F: L10.1 Q5.4 R23.2
VPS-SENSE: C65.1 IC1.12 O7.P$1 R48.2 R49.1 T3.P$1
VSYNC: IC1.8 J1.7 J2.7 O4.P$1 T19.P$1
WAKE-SW: IC1.72 J14.5 O38.P$1 T42.P$1
WE-SRAM: IC1.81 IC2.11 R4.1
XCLK1: IC1.7 J1.13 J2.13 O3.P$1 T16.P$1
Y2: IC1.68 J1.19 J2.19
Y3: IC1.69 J1.21 J2.21
Y4: IC1.70 J1.22 J2.22
Y5: IC1.71 J1.20 J2.20
Y6: IC1.79 J1.18 J2.18
Y7: IC1.80 J1.16 J2.16
Y8: IC1.47 J1.14 J2.14
Y9: IC1.48 J1.12 J2.12

## Tracks (layer width: path | path; a pad name or v marks a point on that pad's centre or on a via)
1.5V-CAM  (2 unrouted)
1.5V-CAM-OUT  (3 unrouted)
3.3V/CAM  (16 unrouted)
+3,3V-FILT  (2 unrouted)
+3.3V  (37 unrouted)
+3.3V/1  (16 unrouted)
+3.3V/2  (8 unrouted)
+3.3V/VPS  (9 unrouted)
/3.3V1PWRON  (3 unrouted)
/3.3V2PWRON  (3 unrouted)
/CAM-PWRON  (3 unrouted)
/FMEM1-CS  (4 unrouted)
/MCLR  (2 unrouted)
/NCS  (3 unrouted)
/PRESENT  (2 unrouted)
/VPS-PWRON  (3 unrouted)
A0  (1 unrouted)
A1  (1 unrouted)
A2  (1 unrouted)
A3  (1 unrouted)
A4  (1 unrouted)
A5  (1 unrouted)
A6  (1 unrouted)
A7  (1 unrouted)
A8  (1 unrouted)
A9  (1 unrouted)
A10  (1 unrouted)
A11  (1 unrouted)
A12  (1 unrouted)
A13  (1 unrouted)
A14  (1 unrouted)
A15  (1 unrouted)
A16  (1 unrouted)
A17  (1 unrouted)
A18  (1 unrouted)
A19  (1 unrouted)
A20  (1 unrouted)
A+  (2 unrouted)
A++  (4 unrouted)
AGND1  (3 unrouted)
AGND2  (3 unrouted)
AVDD  (4 unrouted)
AVDD1  (3 unrouted)
AVDD2  (3 unrouted)
B-  (2 unrouted)
B--  (4 unrouted)
BT-RTS  (3 unrouted)
BT-RX  (3 unrouted)
BT-TX  (3 unrouted)
CON-LED  (3 unrouted)
CS-SRAM  (4 unrouted)
CURR-SENSE  (4 unrouted)
D0  (3 unrouted)
D1  (3 unrouted)
D2  (3 unrouted)
D3  (3 unrouted)
D4  (3 unrouted)
D5  (3 unrouted)
D6  (3 unrouted)
D7  (3 unrouted)
D_N  (2 unrouted)
D_P  (2 unrouted)
DGND  (168 unrouted)
DGND-F  (8 unrouted)
DOOR1IN  (4 unrouted)
DOOR2IN  (4 unrouted)
DOOR-IN-EN  (6 unrouted)
DOVDD1  (3 unrouted)
DOVDD2  (3 unrouted)
DVDD1  (3 unrouted)
DVDD2  (3 unrouted)
EN  (3 unrouted)
GATE-Q12A  (3 unrouted)
GATE-Q12B  (3 unrouted)
HREF  (4 unrouted)
INFRA1PWM  (3 unrouted)
INFRA2PWM  (3 unrouted)
IRQ  (3 unrouted)
L1CTL  (2 unrouted)
L1PWR  (2 unrouted)
L2CTL  (2 unrouted)
L2PWR  (2 unrouted)
LAN-CTL  (5 unrouted)
LAN-RX  (4 unrouted)
LAN-TX  (4 unrouted)
LED-PIC  (4 unrouted)
LEH-SRAM  (2 unrouted)
LEL-SRAM  (2 unrouted)
LOCK1CTL  (4 unrouted)
LOCK1IN  (4 unrouted)
LOCK2CTL  (4 unrouted)
LOCK2IN  (4 unrouted)
LOCK12PWR  (6 unrouted)
LOCK-IN-EN  (6 unrouted)
N$1  (1 unrouted)
N$2  (1 unrouted)
N$3  (3 unrouted)
N$4  (2 unrouted)
N$5  (1 unrouted)
N$6  (2 unrouted)
N$7  (2 unrouted)
N$8  (1 unrouted)
N$9  (2 unrouted)
N$10  (1 unrouted)
N$11  (1 unrouted)
N$12  (2 unrouted)
N$13  (2 unrouted)
N$14  (1 unrouted)
N$15  (1 unrouted)
N$16  (1 unrouted)
N$17  (1 unrouted)
N$18  (2 unrouted)
N$19  (1 unrouted)
N$20  (3 unrouted)
N$21  (3 unrouted)
N$22  (1 unrouted)
N$23  (3 unrouted)
N$24  (1 unrouted)
N$25  (1 unrouted)
N$26  (2 unrouted)
N$27  (2 unrouted)
N$28  (2 unrouted)
N$29  (3 unrouted)
N$30  (1 unrouted)
N$31  (3 unrouted)
N$32  (2 unrouted)
N$33  (3 unrouted)
N$35  (1 unrouted)
N$36  (1 unrouted)
N$37  (2 unrouted)
N$38  (4 unrouted)
N$39  (2 unrouted)
N$40  (1 unrouted)
N$41  (2 unrouted)
N$43  (1 unrouted)
N$44  (3 unrouted)
N$46  (3 unrouted)
N$47  (3 unrouted)
N$48  (1 unrouted)
N$49  (3 unrouted)
N$50  (3 unrouted)
N$51  (1 unrouted)
N$52  (3 unrouted)
N$53  (1 unrouted)
N$54  (1 unrouted)
N$55  (2 unrouted)
N$56  (1 unrouted)
N$57  (1 unrouted)
N$58  (3 unrouted)
N$59  (1 unrouted)
N$60  (1 unrouted)
N$61  (2 unrouted)
N$62  (1 unrouted)
N$63  (3 unrouted)
N$64  (2 unrouted)
N$65  (2 unrouted)
N$66  (2 unrouted)
N$67  (3 unrouted)
N$68  (1 unrouted)
N$70  (2 unrouted)
N$73  (3 unrouted)
N$74  (1 unrouted)
N$76  (2 unrouted)
N$77  (5 unrouted)
N$78  (5 unrouted)
N$79  (2 unrouted)
N$80  (2 unrouted)
N$81  (2 unrouted)
N$83  (2 unrouted)
N$85  (4 unrouted)
N$87  (1 unrouted)
OE-SRAM  (2 unrouted)
OUT+3.3V  (7 unrouted)
PCLK  (4 unrouted)
PGC  (2 unrouted)
PGD  (2 unrouted)
POWER-GOOD  (3 unrouted)
PWDN-CAM1  (4 unrouted)
PWDN-CAM2  (4 unrouted)
REF2,5V  (2 unrouted)
REF-EN  (1 unrouted)
RESET-CAM1  (2 unrouted)
RESET-CAM2  (2 unrouted)
SCL1-EEPROM  (3 unrouted)
SCLK2-SPI  (3 unrouted)
SD-CS  (4 unrouted)
SDA1-EEPROM  (3 unrouted)
SDI2-MISO  (5 unrouted)
SDO2-MOSI  (5 unrouted)
SIO-C-CAM  (3 unrouted)
SIO-D-CAM  (3 unrouted)
VBAT  (27 unrouted)
VBAT-LAN  (5 unrouted)
VBAT-LAN-F  (11 unrouted)
VBAT-ON  (5 unrouted)
VBAT-SENSE  (4 unrouted)
VBATLAN-SENSE  (4 unrouted)
VBUS  (1 unrouted)
VCAP  (2 unrouted)
VPS-ON  (4 unrouted)
VPS-PWR  (3 unrouted)
VPS-PWR-F  (2 unrouted)
VPS-SENSE  (5 unrouted)
VSYNC  (4 unrouted)
WAKE-SW  (3 unrouted)
WE-SRAM  (2 unrouted)
XCLK1  (4 unrouted)
Y2  (2 unrouted)
Y3  (2 unrouted)
Y4  (2 unrouted)
Y5  (2 unrouted)
Y6  (2 unrouted)
Y7  (2 unrouted)
Y8  (2 unrouted)
Y9  (2 unrouted)

## Text on the board
tPlace: ACB 1.0 | (C) 2017 eLock Technologies LCC
101-poznamky: Konektor pro BT z bottomu - neni na ose desky ale 3mm od osy | aby pripadny zapichnuty BT modul byl vycentrovany vuci desce | (BT je siroky 29mm vcetne trcici antenky, ktera trci 6mm) | ve vertikalnim smeru lze konektor BT libovolne posunout | tento postor pro drzak kamery | tento postor pro drzak kamery | bych chtel nechat volny | bych chtel nechat volny | v topu i bottomu | v topu i bottomu | tedy trochu vic nez vlastni | tedy trochu vic nez vlastni | holder jak je namalovany | holder jak je namalovany | myslim ze takto by SD vychazela nejlepe | TP1 musi byt pristupny nezakryty VPS | takto by sla SD vytahnout i ze sestavy | tedy poku by tam nebyl distanční sloupek pro BT | Montazni otvor BT asi ne, byla by to hrozna drbacka | FLASH, VPS a SD karta by mely byt u sebe | maji spolecnou SPI a napajeni - tzn 4 draty | tady je VPS asi v docela optimalni pozici | jeste by sla posunout 1mm doleva (az k hrane desky) | a 1mm dolu (jeste by nezakryvala mont. sroub) | zasobni kond na konci vodice napajeni 3.3V | myslim ze tohle je pekne misto pro USB | tedy tady nekde | myslim ze tohle je pekne misto pro programovaci konektor | montazni odvory jsou ted 3.81mm (150mil) od hran desky | byly 5.08mm (200mil) od hran desky, dost to pomohlo | montazni otvory jsou 6,6mm/3,2mm- zmenseny z 7,0mm | M3 strouby maji hlavu cca 6,0mm + vule sroubu v dire -> 6.4mm je minimum | podlozka po M3 je 7,0/3,2mm a to je taky spravny rozmer montazniho otvoru